# Altium PCB Relayboard.PcbDoc (part 1 of 2)
Units mm, origin at the board's own origin, x right, y up, seen from the top; angles counter-clockwise.
Board outline 76.6 x 71.56 mm, 2 copper layers (Top Layer, Bottom Layer); 43 components, 40 nets, 153 pads, 27 vias.
Unrouted connection lines stored in the file: 21.
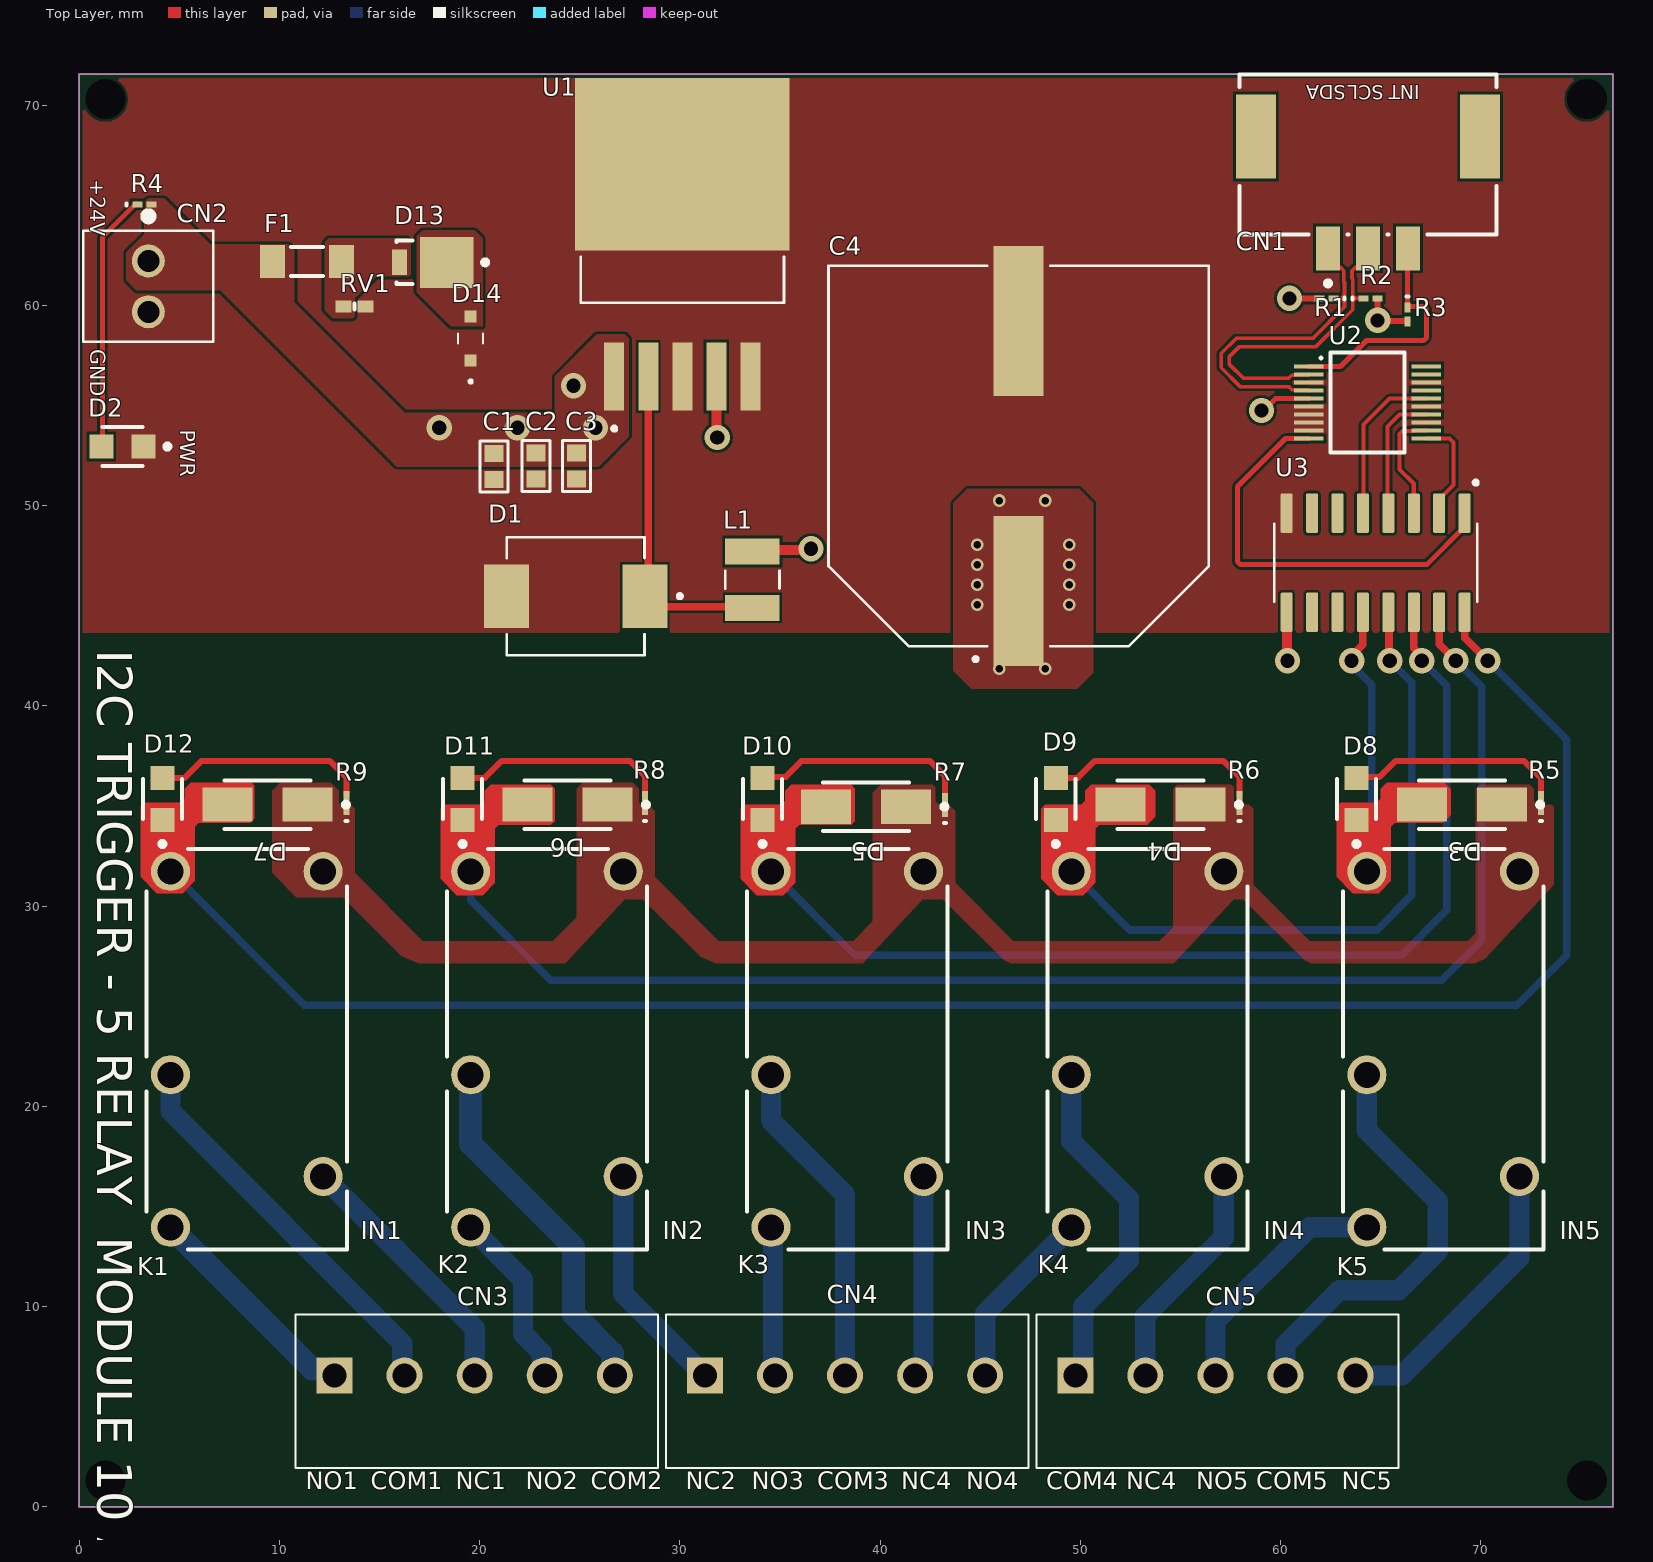
[diagram p0: Top Layer view]
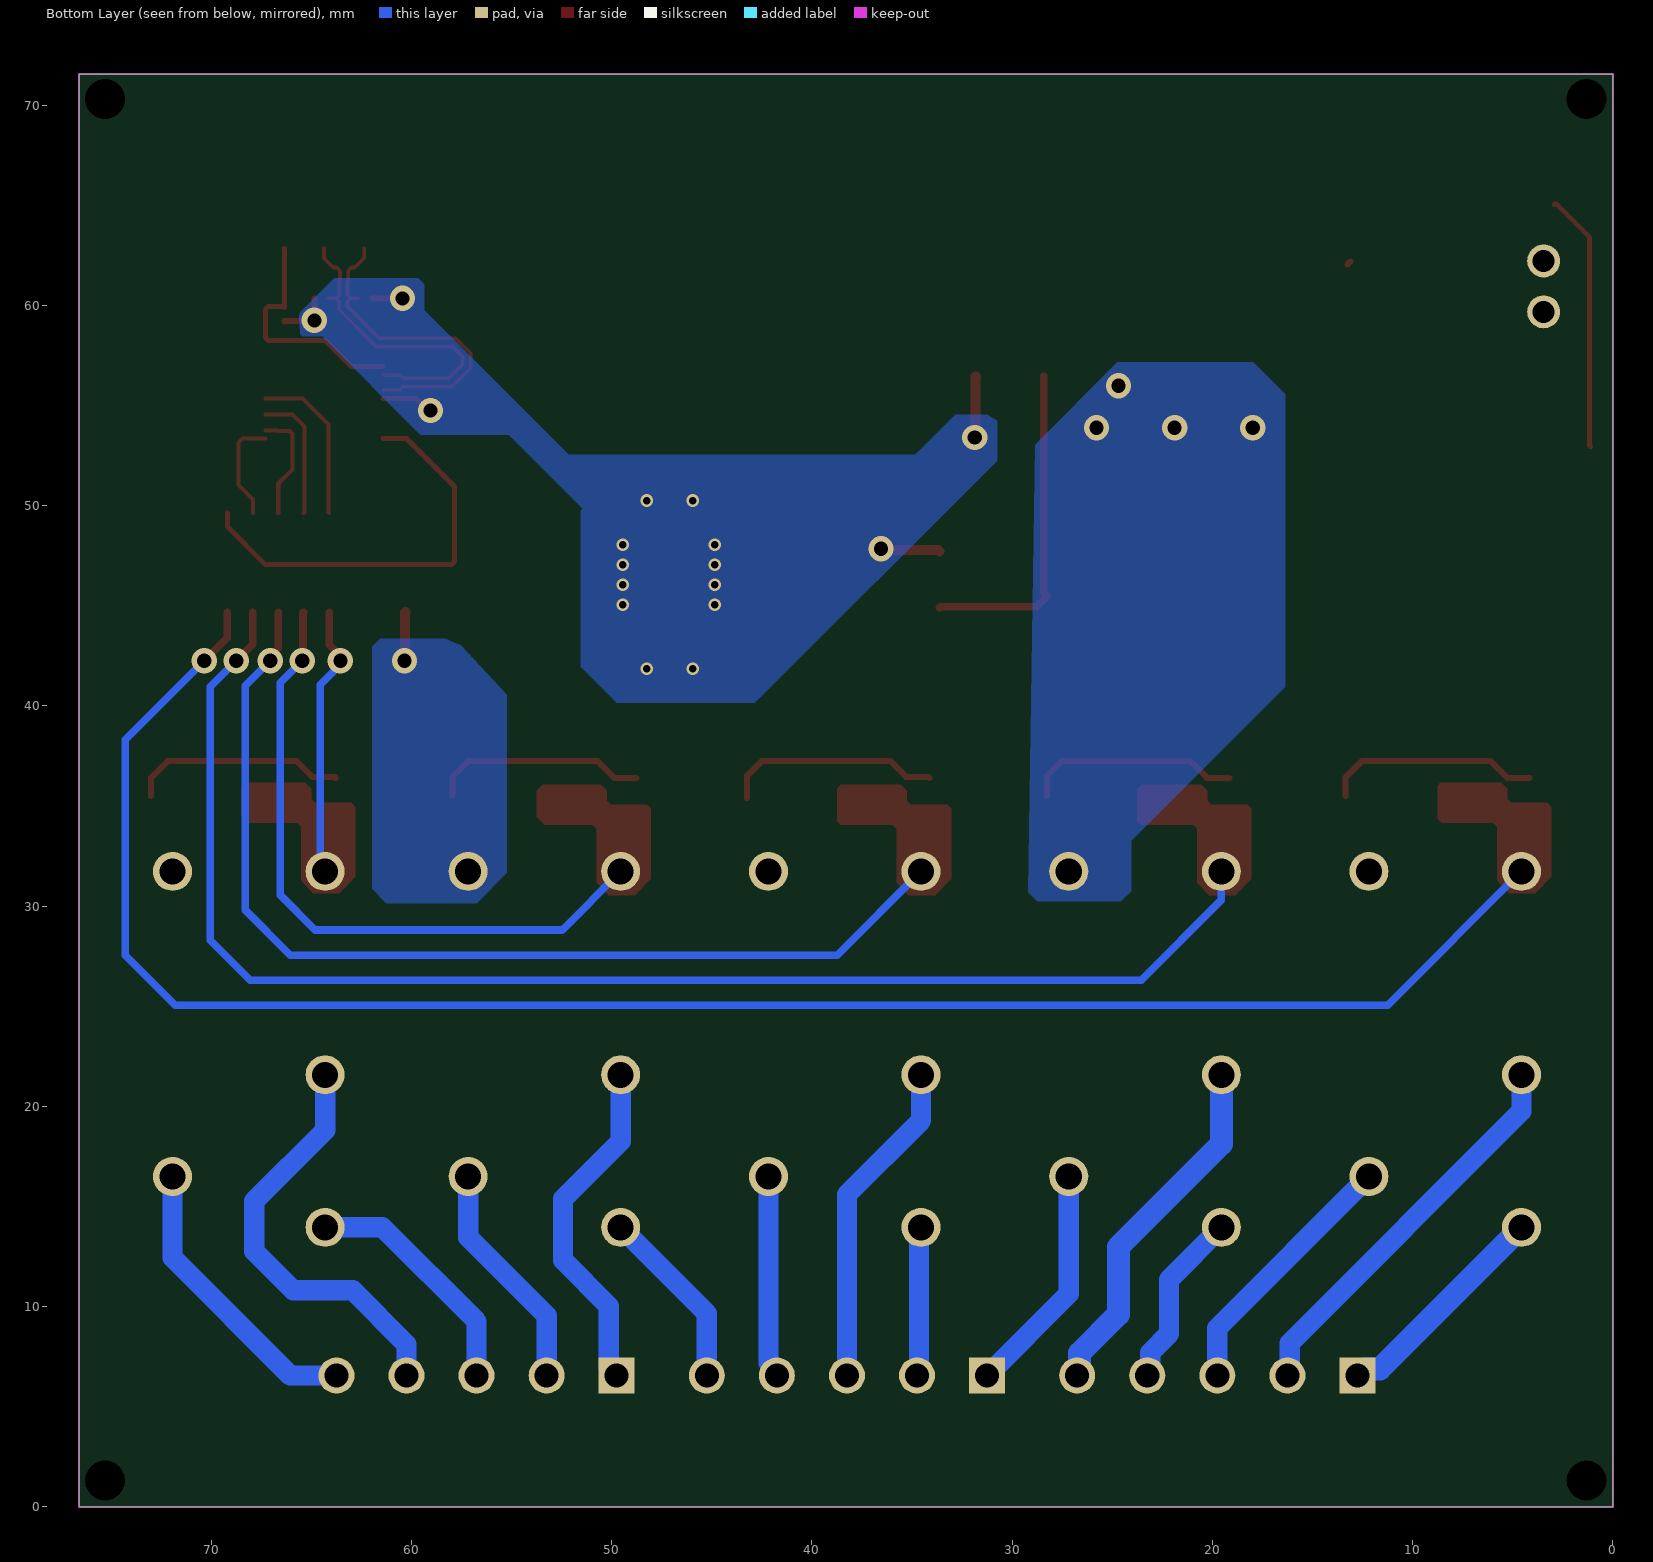
[diagram p1: Bottom Layer view, seen from below]
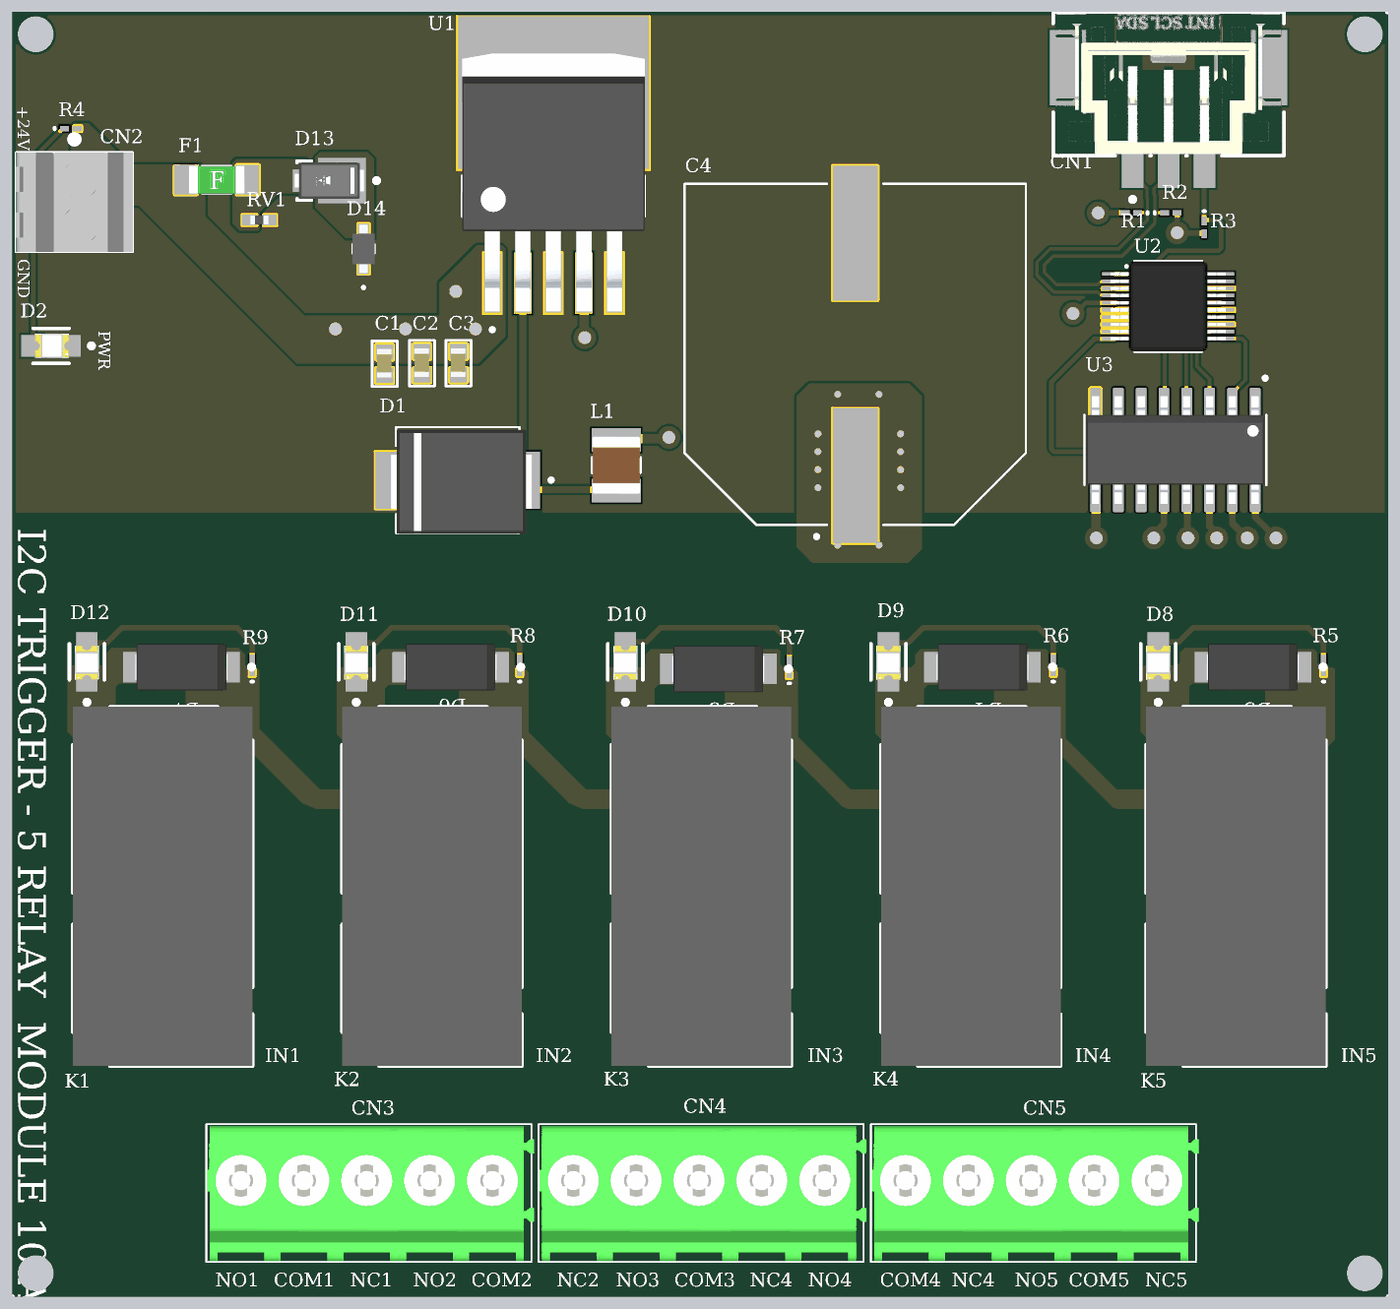
[diagram p2: 3D render of the assembled board from above, using the file's embedded part models]

## Layer stack, top to bottom
Top Solder: solder mask 0.0102, Solder Resist, Dk 3.5
Top Layer: signal copper 0.0356
Dielectric 1: dielectric 0.32, FR-4, Dk 4.8
Bottom Layer: signal copper 0.0356
Bottom Solder: solder mask 0.0102, Solder Resist, Dk 3.5

## Board outline
0,0 0,71.556 76.603,71.556 76.603,0 5.871,0

## Design rules (kind name [scope] priority, off if disabled: settings)
Clearance [All] p1: gap=0.127 ignorepadtopadclearanceinfootprint=FALSE
Clearance Contact_Clearence [InNetClass('Contact')] p2: gap=1.397 ignorepadtopadclearanceinfootprint=FALSE
Clearance 24V_Clearance [InNetClass('24V')] p3: gap=0.152 ignorepadtopadclearanceinfootprint=FALSE
DiffPairsRouting I2C [All] p1: maxlimit=0.127 minlimit=0.127 mostfreqgap=0.127 toplayer_minwidth=0.279 toplayer_maxwidth=1.095 toplayer_prefwidth=0.279 bottomlayer_minwidth=0.279 bottomlayer_maxwidth=1.095 bottomlayer_prefwidth=0.279 impedanceprofiledriven=TRUE impedanceprofileid={0FCB3889-9E1A-408E-99D7-05F87C115106} impedanceprofilevalue=90.000000 maxuncoupledlength=12.7
DiffPairsRouting DiffPairsRouting_1 [All] p2: maxlimit=0.254 minlimit=0.254 mostfreqgap=0.254 toplayer_minwidth=0.381 toplayer_maxwidth=0.381 toplayer_prefwidth=0.381 bottomlayer_minwidth=0.381 bottomlayer_maxwidth=0.381 bottomlayer_prefwidth=0.381 maxuncoupledlength=12.7
PolygonConnect [All] p1: connectstyle=Direct reliefconductorwidth=0.254 reliefentries=4 polygonreliefangle="90 Angle" airgapwidth=0.254
RoutingVias [All] p1: holewidth=0.711 width=1.27 viastyle="Through Hole" minholewidth=0.711 minwidth=1.27 maxholewidth=0.711 maxwidth=1.27
SilkToSolderMaskClearance [IsText] p1: minsilkscreentomaskgap=0.254 clearancetoexposedcopper=TRUE
SolderMaskExpansion [All] p1: expansion=0.102 istentingtop=FALSE
Width Contact_Width [InNetClass('Contact')] p1: maxlimit=1.27 minlimit=1.016 preferedwidth=1.143
Width 24V_Width [All] p2: maxlimit=0.508 minlimit=0.254 preferedwidth=0.381
Width [All] p3: maxlimit=0.305 minlimit=0.203 preferedwidth=0.254
28 further rules are at their usual default settings.

## Classes and differential pairs
net class 24V: OUT4
net class Contact: NetCN3_1 NetCN3_2 NetCN3_3 NetCN3_4 NetCN3_5 NetCN4_1 NetCN4_2 NetCN4_3 NetCN4_4 NetCN4_5 NetCN5_1 NetCN5_2 NetCN5_3 NetCN5_4 NetCN5_5
component class RELAYBOARD: C1 C2 C3 C4 D1 D2 D3 D4 D5 D6 D7 D8 D9 D10 D11 D12 D13 D14 F1 K1 K2 K3 K4 K5 L1 R1 R2 R3 R4 R5 R6 R7 R8 R9 RV1 U1 U2 U3
component class connectors: CN1 CN2 CN3 CN4 CN5
differential pair I2C_DIF: +I2C_SCL -I2C_SDA

## Components (designator, comment, footprint, x,y, rotation, side; value= is the part's Value field where it differs from the comment)
C1 "1uF" CAP-0603 20.73,51.956 r90 top
C2 "10nF" CAP-0603 22.812,51.987 r90 top
C3 "100nF" CAP-0603 24.844,51.987 r90 top
C4 "1000uF" "CAP RADIAL 1000UF" 47.055,52.356 r90 top
CN1 "5600200320" 5600200320 64.374,67.538 r180 top
CN2 "282834-2" 282834-2 3.455,60.956 r270 top
CN3 "1984646" 1984646 19.755,6.556 r0 top locked
CN4 "1984646" 1984646 38.255,6.556 r0 top locked
CN5 "1984646" 1984646 56.755,6.556 r0 top locked
D1 "SS34" SS34 24.8,45.479 r180 top
D2 "LS R976-NR-1" "LS R976-NR-1" 2.155,52.956 r180 top
D3 "S1A-13-F" S1A-13-F 69.069,35.065 r180 top locked
D4 "S1A-13-F" S1A-13-F 54.013,35.065 r180 top locked
D5 "S1A-13-F" S1A-13-F 39.305,34.965 r180 top locked
D6 "S1A-13-F" S1A-13-F 24.397,35.065 r180 top locked
D7 "S1A-13-F" S1A-13-F 9.414,35.065 r180 top locked
D8 "LS R976-NR-1" "LS R976-NR-1" 63.797,35.356 r90 top locked
D9 "LS R976-NR-1" "LS R976-NR-1" 48.779,35.356 r90 top locked
D10 "LS R976-NR-1" "LS R976-NR-1" 34.133,35.356 r90 top locked
D11 "LS R976-NR-1" "LS R976-NR-1" 19.152,35.356 r90 top locked
D12 "LS R976-NR-1" "LS R976-NR-1" 4.155,35.356 r90 top locked
D13 "SS3P5-M3/84A" SS3P5-M3/84A 17.655,62.156 r180 top
D14 "PESD1IVN27-AX" PESD1IVN27-AX 19.555,58.356 r90 top
F1 "SF-1206S150-2" "FUSE 1206_3216 0.6MM" 11.38,62.206 r0 top
K1 "ALQ1F24" ALQ1F24-5 8.374,22.846 r270 top locked
K2 "ALQ1F24" ALQ1F24-5 23.365,22.846 r270 top locked
K3 "ALQ1F24" ALQ1F24-5 38.365,22.846 r270 top locked
K4 "ALQ1F24" ALQ1F24-5 53.365,22.846 r270 top locked
K5 "ALQ1F24" ALQ1F24-5 68.129,22.846 r270 top locked
L1 "100uH" CBC3225T101MR 33.63,46.306 r90 top
R1 "10K" 0603 62.305,60.356 r180 top
R2 "10K" 0603 64.505,60.356 r0 top
R3 "10K" 0603 66.355,59.556 r270 top
R4 "1.2K" 0603 3.255,65.056 r0 top
R5 "1.2K" 0603 73.006,35.156 r90 top locked
R6 "1.2K" 0603 57.955,35.156 r90 top locked
R7 "1.2K" 0603 43.255,35.056 r90 top locked
R8 "1.2K" 0603 28.255,35.156 r90 top locked
R9 "1.2K" 0603 13.355,35.156 r90 top locked
RV1 "EZA-EG2N50AX" EZA-EG2N50AX 13.755,59.956 r180 top
U1 "LM2576SX-5.0/NOPB" LM2576SX-5.0/NOPB 30.125,61.754 r90 top
U2 "PCF8574DGVR" TVSOP-20 64.355,55.156 r0 top
U3 "SN75469DR" SN75469DR-SOIC16 64.755,47.156 r270 top

## Footprints (in the part's own frame and the unit in brackets; to place one, negate y for a bottom-side part, rotate by r counter-clockwise, add the part's x,y. Pads: shape width x height; smd on the part's side, far side on the other; paste and mask are expansions set on the pad)
0603 [mm] "Chip Inductor, Body 0.6x0.3mm, IPC High Density"
  rect 0.5x0.3 smd: 1(-0.35,0) 2(0.35,0)
  silkscreen extent -0.9,-0.05 -0.9,0.05, body extent -0.33,-0.18 0.33,0.18, height 0.55
282834-2 [mm]
  round 1.65 hole 1.1: 1(-1.27,0) 2(1.27,0)
  silkscreen extent -3.7,-3.25 2.77,3.25, body extent -2.77,-3.25 2.77,3.25, height 9.5
1984646 [mm]
  rect 1.8x1.8 hole 1.2: 1(-7,0)
  round 1.8 hole 1.2: 2(-3.5,0) 3(0,0) 4(3.5,0) 5(7,0)
  silkscreen extent -8.95,-4.62 9.15,3.05, body extent -8.9,-4.59 9.3,2.96, height 9.15
5600200320 [mm]
  rect 1.2x2.2 smd paste+0 mask+0: 1(2,4.68) 2(0,4.68) 3(-2,4.68)
  rect 2x4.2 smd paste+0 mask+0: 4(-5.6,-0.9) 5(5.6,-0.9)
  silkscreen extent -6.43,-4 6.43,6.55, body extent -6.3,-3.9 6.3,5.25, height 8.2
ALQ1F24-5 [mm]
  round 1.95 hole 1.3: C1(-8.89,3.81) C2(-8.89,-3.81) COM(1.27,-3.81) NC(6.35,3.81) NO(8.89,-3.81)
  silkscreen extent -10,-5 10,5, body extent -10,-5 10,5, height 16.5
"CAP RADIAL 1000UF" [mm]
  rect 7.5x2.5 smd: 1(-6.623,0.127) 2(6.877,0.127)
  silkscreen extent -10.12,-9.37 9.63,9.63, body extent -10.2,-9.5 10.2,9.5, height 16.51
CAP-0603 [mm]
  rect 0.85x0.95 smd: 1(-0.65,0) 2(0.65,0)
  silkscreen extent -1.27,-0.7 1.27,0.7, body extent -0.78,-0.39 0.82,0.44, height 0.82
CBC3225T101MR [mm]
  rect 1.3x2.72 smd: 1(-1.41,0) 2(1.41,0)
  silkscreen extent -0.44,-1.35 0.44,1.35, body extent -1.6,-1.35 1.6,1.35, height 2.55
EZA-EG2N50AX [mm]
  rect 0.8x0.6 smd: 1(-0.55,0) 2(0.55,0)
  silkscreen extent 0,-0.15 0,0.15, body extent -0.5,-0.25 0.5,0.25, height 0.43
"FUSE 1206_3216 0.6MM" [mm] "Chip Fuse 1.5A AC 63V DC, 2-Leads, Body 3.10x1.55mm, IPC Medium Densitym"
  rect 1.25x1.65 smd: 1(-1.725,0) 2(1.725,0)
  silkscreen extent -0.8,-0.72 0.8,0.72, body extent -1.55,-0.77 1.55,0.78, height 0.76
LM2576SX-5.0/NOPB [mm]
  rect 3.4x1 smd paste-3 mask+0: 1(-5.3,3.4) 2(-5.3,1.7) 3(-5.3,0) 4(-5.3,-1.7) 5(-5.3,-3.4)
  rect 8.6x10.7 smd paste-6 mask+0: 6(5.3,0)
  silkscreen extent -8,-5.08 0.68,5.08, body extent -6.88,-5.08 7.48,5.08, height 4.66
"LS R976-NR-1" [mm]
  rect 1.2x1.2 smd paste+0 mask+0: 1(-1.05,0) 2(1.05,0)
  silkscreen extent -2.38,-0.97 1,0.97, body extent -1,-0.68 0.9,0.68, height 0.9
PESD1IVN27-AX [mm]
  rect 0.6x0.6 smd: 1(-1.1,0) 2(1.1,0)
  silkscreen extent -2.2,-0.63 0.25,0.63, body extent -1.34,-0.63 1.34,0.63, height 1.2
S1A-13-F [mm]
  rect 2.5x1.7 smd paste+0 mask+0: 1(-2,0) 2(2,0)
  silkscreen extent -4.03,-1.2 2.15,1.2, body extent -2.6,-1.3 2.6,1.3, height 2.4
SN75469DR-SOIC16 [mm]
  rrect25% 1.97x0.6 smd: 1(-2.475,4.445) 2(-2.475,3.175) 3(-2.475,1.905) 4(-2.475,0.635) 5(-2.475,-0.635) 6(-2.475,-1.905) 7(-2.475,-3.175) 8(-2.475,-4.445) 9(2.475,-4.445) 10(2.475,-3.175) 11(2.475,-1.905) 12(2.475,-0.635) 13(2.475,0.635) 14(2.475,1.905) 15(2.475,3.175) 16(2.475,4.445)
  silkscreen extent -4.1,-5.06 1.95,5.1, body extent -3,-4.95 3,4.95, height 1.75
SS3P5-M3/84A [mil]
  rect 105.12x100 smd paste+0 mask+0: 1(-27.5,0)
  rect 30x50 smd paste+0 mask+0: 2(65.06,0)
  silkscreen extent -108,-43 71,43, body extent -76,-40 76,40, height 39
SS34 [mm]
  rect 2.25x3.18 smd: A(3.455,0) C(-3.455,0)
  silkscreen extent -5.3,-2.95 3.44,2.95, body extent -4.15,-2.8 3.75,3, height 2.46
TVSOP-20 [mm]
  rect 1.475x0.2 smd: 1(-2.938,1.8) 2(-2.938,1.4) 3(-2.938,1) 4(-2.938,0.6) 5(-2.938,0.2) 6(-2.938,-0.2) 7(-2.938,-0.6) 8(-2.938,-1) 9(-2.938,-1.4) 10(-2.938,-1.8) 11(2.938,-1.8) 12(2.938,-1.4) 13(2.938,-1) 14(2.938,-0.6) 15(2.938,-0.2) 16(2.938,0.2) 17(2.938,0.6) 18(2.938,1) 19(2.938,1.4) 20(2.938,1.8)
  silkscreen extent -2.32,-2.5 1.85,2.5, body extent -3.2,-2.5 3.2,2.5, height 1.13

## Part data
C1: library part UMK107ABJ105MAHT, "Cap Ceramic 1uF 50V X5R 20% Pad SMD 0603 85C Low ESR Automotive T/R", Case Code (Metric)=1608, Case Code (Imperial)=0603, Manufacturer="Taiyo Yuden", Max Operating Temperature=85°C, Min Operating Temperature=-55°C, Ratings=AEC-Q200, Supplier Part Number 1=587-4958-1-ND, Tolerance=20%, Voltage Rating=50V, Capacitance=1uF, Case/Package=0603, Category="Ceramic Capacitors", ComponentLink1Description=https://www.yuden.co.jp/productdata/catalog/mlcc_all_hq_e.pdf?src-supplier=Digi-Key, ComponentLink1URL=https://www.yuden.co.jp/productdata/catalog/mlcc_all_hq_e.pdf?src-supplier=Digi-Key, Manufacturer Part Number=UMK107ABJ105MAHT, Mount="Surface Mount", Packaging="Tape and Reel", Pricing 1="1=0,27000, 10=0,18400, 50=0,11020, 100=0,09310, 500=0,06368, 1000=0,05634 (USD)", RoHS=Yes, RoHS Compliant=Yes, Stock 1=1950, Supplier 1=Digi-Key
C2: library part C0603C103M5RAC7411, "Cap Ceramic 0.01uF 50V X7R 20% SMD 0603 125°C Paper T/R", Case Code (Metric)=1608, Case Code (Imperial)=0603, Dielectric=X7R, Dielectric Material=Ceramic, Manufacturer=KEMET, Max Operating Temperature=125°C, Min Operating Temperature=-55°C, Package Quantity=50000, Supplier Part Number 1=399-C0603C103M5RAC7411CT-ND, Tolerance=20%, Voltage Rating=50V, Capacitance=10nF, Case/Package=0603, Category="Ceramic Capacitors", ComponentLink1Description=http://www.mouser.com/ds/2/212/KEM_C1002_X7R_SMD-1102033.pdf?src-supplier=Mouser, ComponentLink1URL=http://www.mouser.com/ds/2/212/KEM_C1002_X7R_SMD-1102033.pdf?src-supplier=Mouser, ComponentLink2Description=http://capacitoredge.kemet.com/capedge2/DataSheet?pn=C0603C103M5RAC7411&src-supplier=Avnet, ComponentLink2URL=http://capacitoredge.kemet.com/capedge2/DataSheet?pn=C0603C103M5RAC7411&src-supplier=Avnet, Construction=Flat, Contact Plating=Tin,Matte, Depth=0.8mm, Height=0.8mm, Lead Pitch=0.7mm, Length=1.6mm, Manufacturer Part Number=C0603C103M5RAC7411, Mount="Surface Mount", Packaging="Tape and Reel", Pricing 1="1=0,10000, 10=0,03000, 50=0,01640, 100=0,01350, 500=0,00962, 1000=0,00756, 2500=0,00688, 5000=0,00632 (USD)", Radiation Hardening=No, RoHS=Yes, RoHS Compliant=Yes, Series=C0603C, Stock 1=336197, Supplier 1=Digi-Key, Termination=SMD/SMT, Voltage Rating (DC)=50V
C3: library part C0603C104K5RAC7411, "Cap Ceramic 0.1uF 50V X7R 10% SMD 0603 125°C Paper T/R 100nF", Case Code (Metric)=1608, Case Code (Imperial)=0603, Dielectric=X7R, Dielectric Material=Ceramic, Manufacturer=KEMET, Max Operating Temperature=125°C, Min Operating Temperature=-55°C, Package Quantity=15000, Supplier Part Number 1=399-7374-2-ND, Tolerance=10%, Voltage Rating=50V, Capacitance=100nF, Case/Package=0603, Category="Ceramic Capacitors", ComponentLink1Description=https://datasheet.ciiva.com/5424/kem-c1002-x7r-smd-5424426.pdf?src-supplier=Mouser, ComponentLink1URL=https://datasheet.ciiva.com/5424/kem-c1002-x7r-smd-5424426.pdf?src-supplier=Mouser, Depth=0.8mm, Dissipation Factor=2.5%, Height=0.8mm, Lead Pitch=0.7mm, Length=1.6mm, Manufacturer Part Number=C0603C104K5RAC7411, Mount="Surface Mount", Packaging="Tape and Reel", Pricing 1="15000=0,01540, 30000=0,01463, 75000=0,01309, 105000=0,01059, 150000=0,01024, 375000=0,00963 (USD)", Radiation Hardening=No, RoHS=Yes, Stock 1=3300000, Supplier 1=Digi-Key, Termination=SMD/SMT, Thickness=0.035inch, Voltage Rating (DC)=50V, Width=0.031inch
C4: library part EEETK1E102AM, "Cap Aluminum Lytic 1000uF 25V 20% (18 X 16.5mm) SMD 0.075 Ohm 1300mA 2000h 125C Automotive T/R", Capacitance=1mF, Case/Package=Radial, ESR (Equivalent Series Resistance)=75mR, Leakage Current=300uA, Manufacturer=Panasonic, Manufacturer Part Number=EEE-TK1E102AM, Max Operating Temperature=125°C, Min Operating Temperature=-40°C, Package Quantity=125, Ripple Current=1.3A, Supplier Part Number 1=PCE4890CT-ND, Tolerance=20%, Voltage=25V, Category="Aluminum Electrolytic Capacitors", ComponentLink1Description=https://datasheet.ciiva.com/11777/0900766b8102e63d-11777138.pdf?src-supplier=RSComponents, ComponentLink1URL=https://datasheet.ciiva.com/11777/0900766b8102e63d-11777138.pdf?src-supplier=RSComponents, ComponentLink2Description=https://datasheet.ciiva.com/24071/aba0000ce121-470559-24071175.pdf?src-supplier=Mouser, ComponentLink2URL=https://datasheet.ciiva.com/24071/aba0000ce121-470559-24071175.pdf?src-supplier=Mouser, Construction=Cylindrical, Diameter=18mm, Dissipation Factor=0.18%, Height=16.5mm, Height - Seated (Max)=0.65inch, Lead Diameter=1.2mm, Lead Free="Lead Free", Lead Pitch=6.7mm, Length=16.5mm, Life (Hours)=2000Hour, Mount="Surface Mount", Number of Pins=16, Packaging="Tape and Reel", Polarity=Polar, Pricing 1="1=3,55000, 10=2,86900, 50=2,50360 (USD)", REACH SVHC="No SVHC", Ripple Current (AC)=1.3A, RoHS=Yes, RoHS Compliant=Yes, Series=TK, Stock 1=337, Supplier 1=Digi-Key, Termination=SMD/SMT, Voltage Rating=25V, Voltage Rating (DC)=25V
CN1: "2.0mmDuraClik Wire-to-Board Header, Single Row, Vertical, 3 Circuits, Tin (Sn) Over Nickel, Natural", Manufacturer=Molex, Supplier Part Number 1=WM10863CT-ND, Category="Headers and Wire Housings", ComponentLink1Description=http://www.farnell.com/datasheets/2214714.pdf?src-supplier=Farnell, ComponentLink1URL=http://www.farnell.com/datasheets/2214714.pdf?src-supplier=Farnell, ComponentLink2Description=http://www.literature.molex.com/SQLImages/kelmscott/Molex/PDF_Images/987650-8742.PDF?src-supplier=Digi-Key, ComponentLink2URL=http://www.literature.molex.com/SQLImages/kelmscott/Molex/PDF_Images/987650-8742.PDF?src-supplier=Digi-Key, ComponentLink3Description=http://www.molex.com/pdm_docs/sd/5600200320_sd.pdf?src-supplier=Avnet, ComponentLink3URL=http://www.molex.com/pdm_docs/sd/5600200320_sd.pdf?src-supplier=Avnet, ComponentLink4Description=http://www.farnell.com/datasheets/2214714.pdf?src-supplier=Newark, ComponentLink4URL=http://www.farnell.com/datasheets/2214714.pdf?src-supplier=Newark, Manufacturer Part Number=5600200320, Pricing 1="1=0,92000, 10=0,75900, 100=0,63250 (USD)", RoHS=Yes, Stock 1=33175, Supplier 1=Digi-Key
CN2: "Conn Terminal Block 2 POS 2.54mm Solder ST Thru-Hole 10A/Contact", Manufacturer="TE Connectivity", Supplier Part Number 1=A98333-ND, Category="Terminal Blocks", ComponentLink1Description=https://datasheet.ciiva.com/11758/0900766b80e7dc96-11758675.pdf?src-supplier=RSComponents, ComponentLink1URL=https://datasheet.ciiva.com/11758/0900766b80e7dc96-11758675.pdf?src-supplier=RSComponents, ComponentLink2Description=https://datasheet.ciiva.com/16386/282834-2-16386363.pdf?src-supplier=Future+Electronics, ComponentLink2URL=https://datasheet.ciiva.com/16386/282834-2-16386363.pdf?src-supplier=Future+Electronics, ComponentLink3Description=https://datasheet.ciiva.com/16676/eng-cs-1308389-eurostyle-terminal-blocks-0607-16676126.pdf?src-supplier=Avnet+Europe, ComponentLink3URL=https://datasheet.ciiva.com/16676/eng-cs-1308389-eurostyle-terminal-blocks-0607-16676126.pdf?src-supplier=Avnet+Europe, ComponentLink4Description=https://datasheet.ciiva.com/823/eng-cd-282834-c1-823453.pdf?src-supplier=Digi-Key, ComponentLink4URL=https://datasheet.ciiva.com/823/eng-cd-282834-c1-823453.pdf?src-supplier=Digi-Key, ComponentLink5Description=https://datasheet.ciiva.com/15169/getdatasheetpartid-155864-15169558.pdf?src-supplier=Verical, ComponentLink5URL=https://datasheet.ciiva.com/15169/getdatasheetpartid-155864-15169558.pdf?src-supplier=Verical, ComponentLink6Description=https://datasheet.ciiva.com/3141/eng-cs-1308389-eurostyle-terminal-blocks-0607-3141115.pdf?src-supplier=Avnet, ComponentLink6URL=https://datasheet.ciiva.com/3141/eng-cs-1308389-eurostyle-terminal-blocks-0607-3141115.pdf?src-supplier=Avnet, ComponentLink7Description=https://datasheet.ciiva.com/30166/eng-cs-1308389-eurostyle-terminal-blocks-0607-30166974.pdf?src-supplier=Onlinecomponents.com, ComponentLink7URL=https://datasheet.ciiva.com/30166/eng-cs-1308389-eurostyle-terminal-blocks-0607-30166974.pdf?src-supplier=Onlinecomponents.com, ComponentLink8Description=https://datasheet.ciiva.com/14609/70086732-14609670.pdf?src-supplier=Allied+Electronics, ComponentLink8URL=https://datasheet.ciiva.com/14609/70086732-14609670.pdf?src-supplier=Allied+Electronics, Manufacturer Part Number=282834-2, Pricing 1="1=1,45000, 10=1,01900, 25=0,95080, 50=0,86300, 100=0,85910, 250=0,72548, 500=0,68728, 1000=0,61092, 5000=0,57274 (USD)", RoHS=Yes, Stock 1=28181, Supplier 1=Digi-Key
CN3 CN4 CN5: "Terminal Block, Printed Circuit, 10 A, 160 V, 3.5 mm, 5, 3.5 mm, 1.2 mm, M2, PA", Color=Green, Current=10A, Current Rating=17.5A, Flammability Rating="UL94 V-0", Manufacturer="Phoenix Contact", Package Quantity=100, Supplier Part Number 1=277-1723-ND, Voltage=300V, Voltage Rating=160V, Approvals=UL, Category="Terminal Blocks", ComponentLink1Description=https://datasheet.ciiva.com/16070/1984646-16070645.pdf?src-supplier=Onlinecomponents.com, ComponentLink1URL=https://datasheet.ciiva.com/16070/1984646-16070645.pdf?src-supplier=Onlinecomponents.com, ComponentLink2Description=https://datasheet.ciiva.com/14608/70055018-14608827.pdf?src-supplier=Allied+Electronics, ComponentLink2URL=https://datasheet.ciiva.com/14608/70055018-14608827.pdf?src-supplier=Allied+Electronics, ComponentLink3Description=https://datasheet.ciiva.com/824/combiconcompactseries-824269.pdf?src-supplier=Digi-Key, ComponentLink3URL=https://datasheet.ciiva.com/824/combiconcompactseries-824269.pdf?src-supplier=Digi-Key, ComponentLink4Description=https://datasheet.ciiva.com/29221/568532-da-01-en-leiterplatten-anschlusskl-1984646-100st-29221147.pdf?src-supplier=Conrad, ComponentLink4URL=https://datasheet.ciiva.com/29221/568532-da-01-en-leiterplatten-anschlusskl-1984646-100st-29221147.pdf?src-supplier=Conrad, Contact Material=Tin, Depth=9.2mm, Gender=Male, Height=9mm, Housing Color=Green, Housing Material=Nylon, Lead Free="Lead Free", Length=7.6mm, Manufacturer Part Number=1984646, Material=Polyamide, Max Current Rating=17.5A, Mount="Through Hole", Number of Circuits=5, Number of Contacts=5, Number of Levels=1, Number of Pins=5, Number of Poles=5, Number of Positions=5, Number of Positions Per Level=5, Number of Rows=1, Orientation=Straight, Packaging=Bulk, Pitch=3.5mm, Pricing 1="1=1,25000, 10=1,19900, 50=1,16640, 100=1,09000, 250=1,03768 (USD)", RoHS=Yes, Stock 1=1070, Stripping Length=5mm, Supplier 1=Digi-Key, Termination=Screw, Weight=0.080425oz, Width=17.5mm, Wire Gauge (Max)=26AWG, Wire Gauge (Min)=26AWG, Insulation Material=Nylon
D1: "SS Series 500 mV 3 A 40 V Max Reverse Voltage Schottky Rectifier - DO-214AB", Average Rectified Current=3A, Case/Package=SMC, Forward Voltage=500mV, Manufacturer="ON Semiconductor / Fairchild", Max Forward Surge Current (Ifsm)=100A, Max Operating Temperature=150°C, Max Power Dissipation=2.27W, Max Repetitive Reverse Voltage (Vrrm)=40V, Max Reverse Current=500uA, Min Operating Temperature=-55°C, Package Quantity=1, Supplier Part Number 1=SS34FSTR-ND, Category="Schottky Diodes", Contact Plating=Tin,Matte, Current=3A, Current Rating=3A, Element Configuration=Single, Forward Current=3A, Height=2.75mm, Lead Free="Lead Free", Length=7.15mm, Manufacturer Part Number=SS34, Max Reverse Leakage Current=500uA, Max Reverse Voltage (DC)=40V, Max Surge Current=100A, Mount="Surface Mount", Number of Elements=1, Number of Pins=2, Number of Terminals/Pins=2, Output Current=3A, Packaging="Tape and Reel", Peak Non-Repetitive Surge Current=100A, Polarity=Standard, Pricing 1="3000=0,28805 (USD)", Radiation Hardening=No, REACH SVHC="No SVHC", RoHS=Yes, RoHS Compliant=Yes, Stock 1=48500, Supplier 1=Digi-Key, Voltage=40V, Voltage Rating (DC)=40V, Width=6.25mm
D2 D8 D9 D10 D11 D12: "Led SMT Red 0805 Tape", Case Code (Metric)=2012, Case Code (Imperial)=0805, Color=Red, Forward Current=25mA, Forward Voltage=2.5V, Lens Color=White, Manufacturer="Osram Opto", Manufacturer Part Number=LSR976-NR-1, Max Operating Temperature=85°C, Min Operating Temperature=-30°C, Package Quantity=16000, Power Dissipation=65mW, Reverse Voltage=12V, Supplier Part Number 1=475-1278-1-ND, Test Current=20mA, Case/Package=0805, Category=LEDs, ComponentLink1Description=https://datasheet.ciiva.com/4688/o-ls-ly-r976-24152-4688435.pdf?src-supplier=Mouser, ComponentLink1URL=https://datasheet.ciiva.com/4688/o-ls-ly-r976-24152-4688435.pdf?src-supplier=Mouser, ComponentLink2Description=https://datasheet.ciiva.com/26920/getdatasheetpartid-568367-26920831.pdf?src-supplier=Verical, ComponentLink2URL=https://datasheet.ciiva.com/26920/getdatasheetpartid-568367-26920831.pdf?src-supplier=Verical, ComponentLink3Description=https://datasheet.ciiva.com/2112/00078896-0-2112782.pdf?src-supplier=Digi-Key, ComponentLink3URL=https://datasheet.ciiva.com/2112/00078896-0-2112782.pdf?src-supplier=Digi-Key, ComponentLink4Description=https://datasheet.ciiva.com/2112/00078896-0-2112781.pdf?src-supplier=Digi-Key, ComponentLink4URL=https://datasheet.ciiva.com/2112/00078896-0-2112781.pdf?src-supplier=Digi-Key, ComponentLink5Description=https://datasheet.ciiva.com/2112/00078896-0-2112783.pdf?src-supplier=Digi-Key, ComponentLink5URL=https://datasheet.ciiva.com/2112/00078896-0-2112783.pdf?src-supplier=Digi-Key, Depth=1.35mm, Dominant Wavelength=633nm, Height=0.9mm, Length=2.1mm, Lens Size=1.25mm, Lens Style=Flat,Diffused,Colorless,Rectangular, Lens Transparency=Diffused, Luminous Flux=0.47lm, Luminous Intensity=180mcd, Mount="Surface Mount", Number of Elements=1, Number of LEDs=1, Number of Pins=2, Packaging="Tape and Reel", Pricing 1="1=0,31000, 10=0,16700, 100=0,07750, 500=0,07152, 1000=0,05602, 2000=0,05483 (USD)", Radiation Hardening=No, RoHS=Yes, RoHS Compliant=Yes, Series="CHIPLED 0805", Stock 1=165904, Supplier 1=Digi-Key, Viewing Angle=160°, Width=1.25mm, Illumination Color=Red
D3 D4 D5 D6 D7: "VR=50V IF=1A 10pF Trr=3us", Average Rectified Current=1A, Capacitance=10pF, Case/Package=SMA, Forward Voltage=1.1V, Manufacturer=Diodes, Max Forward Surge Current (Ifsm)=30A, Max Operating Temperature=150°C, Max Repetitive Reverse Voltage (Vrrm)=50V, Max Reverse Current=5uA, Min Operating Temperature=-65°C, Package Quantity=5000, Supplier Part Number 1=S1A-FDICT-ND, Category="Rectifier Diodes", ComponentLink1Description=https://datasheet.ciiva.com/911/ds16003-911872.pdf?src-supplier=Digi-Key, ComponentLink1URL=https://datasheet.ciiva.com/911/ds16003-911872.pdf?src-supplier=Digi-Key, ComponentLink2Description=https://datasheet.ciiva.com/27052/1541520-27052419.pdf?src-supplier=Jameco, ComponentLink2URL=https://datasheet.ciiva.com/27052/1541520-27052419.pdf?src-supplier=Jameco, ComponentLink3Description=https://datasheet.ciiva.com/8301/ds16003-8301429.pdf?src-supplier=Avnet, ComponentLink3URL=https://datasheet.ciiva.com/8301/ds16003-8301429.pdf?src-supplier=Avnet, ComponentLink4Description=https://datasheet.ciiva.com/22695/1911706-22695830.pdf?src-supplier=Element14, ComponentLink4URL=https://datasheet.ciiva.com/22695/1911706-22695830.pdf?src-supplier=Element14, ComponentLink5Description=https://datasheet.ciiva.com/4453/ds16003-83672-4453580.pdf?src-supplier=Mouser, ComponentLink5URL=https://datasheet.ciiva.com/4453/ds16003-83672-4453580.pdf?src-supplier=Mouser, ComponentLink6Description=https://datasheet.ciiva.com/16199/ds16003-16199336.pdf?src-supplier=Future+Electronics, ComponentLink6URL=https://datasheet.ciiva.com/16199/ds16003-16199336.pdf?src-supplier=Future+Electronics, ComponentLink7Description=https://datasheet.ciiva.com/25953/ds16003-25953033.pdf?src-supplier=Avnet+Europe, ComponentLink7URL=https://datasheet.ciiva.com/25953/ds16003-25953033.pdf?src-supplier=Avnet+Europe, Current Rating=1A, Element Configuration=Single, Forward Current=1A, Height=2.1mm, Lead Free="Lead Free", Length=4.6mm, Manufacturer Part Number=S1A-13-F, Max Reverse Voltage (DC)=50V, Max Surge Current=30A, Mount="Surface Mount", Number of Pins=2, Output Current=1A, Packaging="Tape and Reel", Peak Non-Repetitive Surge Current=30A, Polarity=Standard, Pricing 1="1=0,27000, 10=0,22300, 100=0,11850, 500=0,07796, 1000=0,05301, 2000=0,04782 (USD)", Radiation Hardening=No, REACH SVHC="No SVHC", Recovery Time=1.8us, Reverse Recovery Time=3us, Reverse Voltage (DC)=50V, RoHS=Yes, RoHS Compliant=Yes, Series=-, Stock 1=971381, Supplier 1=Digi-Key, Termination=SMD/SMT, Voltage Rating (DC)=50V, Weight=0.002258oz, Width=2.92mm
D13: "VISHAY   SS3P5-M3/84A   DIODE, RECTIFIER, SCHOTTKY, 3A, 50V, SMP", Average Rectified Current=3A, Case/Package=DO-220AA, Forward Voltage=780mV, Manufacturer=Vishay, Max Forward Surge Current (Ifsm)=45A, Max Operating Temperature=150°C, Max Repetitive Reverse Voltage (Vrrm)=50V, Max Reverse Current=100uA, Min Operating Temperature=-55°C, Package Quantity=3000, Supplier Part Number 1=SS3P5-M3/84AGIDKR-ND, Category="Rectifier Diodes", ComponentLink1Description=https://datasheet.ciiva.com/25932/ss3p5-25932345.pdf?src-supplier=Avnet+Europe, ComponentLink1URL=https://datasheet.ciiva.com/25932/ss3p5-25932345.pdf?src-supplier=Avnet+Europe, ComponentLink2Description=https://datasheet.ciiva.com/29591/ss3p5-29591977.pdf?src-supplier=Digi-Key, ComponentLink2URL=https://datasheet.ciiva.com/29591/ss3p5-29591977.pdf?src-supplier=Digi-Key, ComponentLink3Description=https://datasheet.ciiva.com/8289/ss3p5-8289162.pdf?src-supplier=Avnet, ComponentLink3URL=https://datasheet.ciiva.com/8289/ss3p5-8289162.pdf?src-supplier=Avnet, ComponentLink4Description=https://datasheet.ciiva.com/7962/ss3p5-7962430.pdf?src-supplier=Element14, ComponentLink4URL=https://datasheet.ciiva.com/7962/ss3p5-7962430.pdf?src-supplier=Element14, Element Configuration=Single, Forward Current=3A, Height=1.15mm, Length=3.61mm, Manufacturer Part Number=SS3P5-M3/84A, Max Reverse Voltage (DC)=50V, Mount="Surface Mount", Number of Pins=2, Packaging="Tape and Reel", Peak Non-Repetitive Surge Current=45A, Pricing 1="1=0,45000, 10=0,34200, 100=0,21320, 500=0,14586, 1000=0,11220 (USD)", Radiation Hardening=No, REACH SVHC=Unknown, RoHS=Yes, RoHS Compliant=Yes, Series=eSMP®, Stock 1=773, Supplier 1=Digi-Key, Weight=0.000847oz, Width=2.18mm
D14: "PESD1IVN27-A/SOD323/SOD2", Manufacturer=Nexperia, Supplier Part Number 1=1727-7621-1-ND, Category="TVS Diodes", Manufacturer Part Number=PESD1IVN27-AX, Pricing 1="1=0,38000, 10=0,28000, 100=0,15850, 500=0,10494, 1000=0,08045 (USD)", RoHS=Yes, RoHS Compliant=Yes, Stock 1=374, Supplier 1=Digi-Key
F1: "FUSE BOARD MOUNT 1.5A 63VDC 1206", Breaking Capacity @ Rated Voltage=50A, Current Rating (Amps)=1.5A, Device Package="1206 (3216 Metric)", Manufacturer="Bourns Inc.", Operating Temperature="-20°C ~ 105°C", Supplier Part Number 1=SF-1206S150-2CT-ND, Voltage Rating - DC=63V, Approval Agency=UL, Approvals=UL, ComponentLink1Description=Datasheet, ComponentLink1URL=https://www.bourns.com/docs/Product-Datasheets/sf1206s.pdf, ComponentLink2Description="DigiKey Link", ComponentLink2URL=http://digikey.com/product-detail/en/bourns-inc/SF-1206S150-2/SF-1206S150-2CT-ND/1948213, Fuse Type="Board Mount (Cartridge Style Excluded)", LastUpdated="2.09.2020 01:30:42", Lifecycle Status=Active, Melting I²t=0.236, Minimum Order=1, Mounting Type="Surface Mount", Package / Case="1206 (3216 Metric)", Packaging=TapeAndReel, Part Number=SF-1206S150-2, Part Status=Active, Price=0.33, Response Time="Slow Blow", Series="SinglFuse™ SF-1206S", Size / Dimension="0.122\" L x 0.061\" W x 0.024\" H (3.10mm x 1.55mm x 0.60mm)", Supplier 1=DigiKey
K1 K2 K3 K4 K5: Manufacturer=Panasonic, Supplier Part Number 1=255-ALQ1F24-ND, Manufacturer Part Number=ALQ1F24, Pricing 1="1=3,01000, 10=2,82200, 25=2,50880, 50=2,38340, 100=2,25790, 250=2,00704, 500=1,88160, 1000=1,75616, 5000=1,69344 (USD)", RoHS=No, Stock 1=193, Supplier 1=Digi-Key
L1: library part CBC3225T101MR, "Inductor Power Chip Wirewound 100uH 20% 100KHz Ferrite 0.34A 1.82Ohm DCR 1210 T/R", Case Code (Metric)=3225, Case Code (Imperial)=1210, Current Rating=340mA, DC Resistance (DCR)=1.82R, Manufacturer="Taiyo Yuden", Max Operating Temperature=105°C, Min Operating Temperature=-40°C, Package Quantity=1000, Resistance=1.4R, Resistor Type=Wirewound, Saturation Current=270mA, Self Resonant Frequency=6MHz, Supplier Part Number 1=587-1628-1-ND, Test Frequency=100kHz, Tolerance=20%, Inductor Type=POWER, Case/Package=1210, Category="Fixed Inductors", ComponentLink1Description=https://datasheet.ciiva.com/15981/520cbc3225t101mr-15981701.pdf?src-supplier=Onlinecomponents.com, ComponentLink1URL=https://datasheet.ciiva.com/15981/520cbc3225t101mr-15981701.pdf?src-supplier=Onlinecomponents.com, ComponentLink2Description=https://datasheet.ciiva.com/8001/cbc3225t101mr-ss-8001894.pdf?src-supplier=Element14, ComponentLink2URL=https://datasheet.ciiva.com/8001/cbc3225t101mr-ss-8001894.pdf?src-supplier=Element14, ComponentLink3Description=https://datasheet.ciiva.com/26871/getdatasheetpartid-638535-26871174.pdf?src-supplier=Verical, ComponentLink3URL=https://datasheet.ciiva.com/26871/getdatasheetpartid-638535-26871174.pdf?src-supplier=Verical, Core Material=Ferrite, DC Current=340mA, Depth=2.7mm, Halogen Free="Halogen Free", Height=2.5mm, Height - Seated (Max)=0.106inch, Lead Free="Lead Free", Length=0.126inch, Manufacturer Part Number=CBC3225T101MR, Max DC Current=340mA, Military Standard=Not, Mount="Surface Mount", Number of Pins=2, Packaging="Tape and Reel", Pricing 1="1=0,30000, 10=0,26800, 25=0,23480, 50=0,20120, 100=0,18450, 250=0,16776, 500=0,15768 (USD)", Radiation Hardening=No, REACH SVHC=Unknown, RoHS=Yes, RoHS Compliant=Yes, Series=CB, Shielding=Unshielded, Stock 1=46294, Supplier 1=Digi-Key, Termination=SMD/SMT, Width=0.098inch, Inductance=100uH, Inductance Tolerance=20%
R1 R2 R3: library part RC0603FR-0710KL, "10 kOhms ±1% 0.1W, 1/10W Chip Resistor 0603 (1608 Metric) Moisture Resistant Thick Film", Case Code (Metric)=1608, Case Code (Imperial)=0603, Manufacturer=Yageo, Max Operating Temperature=155°C, Max Power Dissipation=100mW, Min Operating Temperature=-55°C, Resistance=10kR, Resistance Tolerance=1%, Resistor Type="Thick Film", Supplier Part Number 1=311-10.0KHRCT-ND, Temperature Coefficient=100ppm/°C, Voltage Rating=75V, Voltage Rating (DC)=50V, Case/Package=0603, Category="Chip SMD Resistors", ComponentLink1Description=https://datasheet.ciiva.com/7660/38590-7660789.pdf?src-supplier=Element14, ComponentLink1URL=https://datasheet.ciiva.com/7660/38590-7660789.pdf?src-supplier=Element14, ComponentLink2Description=https://datasheet.ciiva.com/7983/443971-7983596.pdf?src-supplier=Element14, ComponentLink2URL=https://datasheet.ciiva.com/7983/443971-7983596.pdf?src-supplier=Element14, ComponentLink3Description=https://datasheet.ciiva.com/22747/443971-22747519.pdf?src-supplier=Element14, ComponentLink3URL=https://datasheet.ciiva.com/22747/443971-22747519.pdf?src-supplier=Element14, ComponentLink4Description=https://datasheet.ciiva.com/46440/1868787-46440891.pdf?src-supplier=Element14, ComponentLink4URL=https://datasheet.ciiva.com/46440/1868787-46440891.pdf?src-supplier=Element14, ComponentLink5Description=https://datasheet.ciiva.com/7746/1738695-7746239.pdf?src-supplier=Element14, ComponentLink5URL=https://datasheet.ciiva.com/7746/1738695-7746239.pdf?src-supplier=Element14, ComponentLink6Description=https://datasheet.ciiva.com/15189/getdatasheetpartid-409289-15189591.pdf?src-supplier=Verical, ComponentLink6URL=https://datasheet.ciiva.com/15189/getdatasheetpartid-409289-15189591.pdf?src-supplier=Verical, Construction=Rectangular, Depth=0.8mm, Features="Moisture Resistant", Height=0.45mm, Lead Free="Lead Free", Lead Pitch=0.3mm, Length=1.6mm, Manufacturer Part Number=RC0603FR-0710KL, Military Standard=Not, Number of Pins=2, Number of Terminations=2, Packaging="Tape and Reel", Power Rating=100mW, Pricing 1="1=0,10000, 10=0,02400, 100=0,00970, 1000=0,00436, 2500=0,00378 (USD)", REACH SVHC=Unknown, RoHS=Yes, RoHS Compliant=Yes, Series=RC, Size Code=0603, Stock 1=28996893, Supplier 1=Digi-Key, Termination=SMD/SMT, Tolerance=1%, Weight=7.1E-05oz, Width=0.8mm
R4 R5 R6 R7 R8 R9: library part RC0603JR-071K2L, "1.2 kOhms ±5% 0.1W, 1/10W Chip Resistor 0603 (1608 Metric) Moisture Resistant Thick Film", Case Code (Metric)=1005, Case Code (Imperial)=0402, Manufacturer=Yageo, Manufacturer Part Number=RC0402JR-071K2L, Max Operating Temperature=155°C, Max Power Dissipation=63mW, Min Operating Temperature=-55°C, Package Quantity=1, Power Rating=62.5mW, Resistance=1.2kR, Resistance Tolerance=5%, Resistor Type="Thick Film", Supplier Part Number 1=311-1.2KGRCT-ND, Temperature Coefficient=100ppm/°C, Voltage Rating=50V, Case/Package=0402, Category="Chip SMD Resistors", ComponentLink1Description=https://datasheet.ciiva.com/7983/1018594-7983557.pdf?src-supplier=Element14, ComponentLink1URL=https://datasheet.ciiva.com/7983/1018594-7983557.pdf?src-supplier=Element14, ComponentLink2Description=https://datasheet.ciiva.com/12558/pyu-rc0402-51-rohs-l-6-r-8721-12558349.pdf?src-supplier=Mouser, ComponentLink2URL=https://datasheet.ciiva.com/12558/pyu-rc0402-51-rohs-l-6-r-8721-12558349.pdf?src-supplier=Mouser, ComponentLink3Description=https://datasheet.ciiva.com/7850/1018594-7850165.pdf?src-supplier=Element14, ComponentLink3URL=https://datasheet.ciiva.com/7850/1018594-7850165.pdf?src-supplier=Element14, ComponentLink4Description=https://datasheet.ciiva.com/15189/getdatasheetpartid-325064-15189548.pdf?src-supplier=Verical, ComponentLink4URL=https://datasheet.ciiva.com/15189/getdatasheetpartid-325064-15189548.pdf?src-supplier=Verical, ComponentLink5Description=https://datasheet.ciiva.com/17068/pyu-rc0402-51-rohs-l-6-r-17068326.pdf?src-supplier=Future+Electronics, ComponentLink5URL=https://datasheet.ciiva.com/17068/pyu-rc0402-51-rohs-l-6-r-17068326.pdf?src-supplier=Future+Electronics, ComponentLink6Description=https://datasheet.ciiva.com/2452/pyu-r-int-thick-7-2452873.pdf?src-supplier=Digi-Key, ComponentLink6URL=https://datasheet.ciiva.com/2452/pyu-r-int-thick-7-2452873.pdf?src-supplier=Digi-Key, ComponentLink7Description=https://datasheet.ciiva.com/2452/pyu-r-int-thick-7-2452874.pdf?src-supplier=Digi-Key, ComponentLink7URL=https://datasheet.ciiva.com/2452/pyu-r-int-thick-7-2452874.pdf?src-supplier=Digi-Key, ComponentLink8Description=https://datasheet.ciiva.com/2452/pyu-r-int-thick-7-2452872.pdf?src-supplier=Digi-Key, ComponentLink8URL=https://datasheet.ciiva.com/2452/pyu-r-int-thick-7-2452872.pdf?src-supplier=Digi-Key, ComponentLink9Description=https://datasheet.ciiva.com/7746/443971-7746456.pdf?src-supplier=Element14, ComponentLink9URL=https://datasheet.ciiva.com/7746/443971-7746456.pdf?src-supplier=Element14, ComponentLink10Description=https://datasheet.ciiva.com/7746/443971-7746455.pdf?src-supplier=Element14, ComponentLink10URL=https://datasheet.ciiva.com/7746/443971-7746455.pdf?src-supplier=Element14, Construction=Rectangular, Depth=0.5mm, Features="Moisture Resistant", Height=0.35mm, Lead Free="Lead Free", Length=1mm, Military Standard=Not, Number of Pins=2, Number of Terminations=2, Packaging="Tape and Reel", Pricing 1="1=0,10000, 10=0,01300, 100=0,00540, 1000=0,00244, 2500=0,00212, 5000=0,00175 (USD)", Pricing 2="1=0,10000, 10=0,02000, 100=0,00800, 1000=0,00360, 2500=0,00312 (USD)", REACH SVHC="No SVHC", RoHS=Yes, RoHS Compliant=Yes, Series=RC, Size Code=0402, Stock 1=52843, Stock 2=141800, Supplier 1=Digi-Key, Termination=SMD/SMT, Tolerance=5%, Voltage Rating (DC)=50V, Width=0.5mm
RV1: "ESD Suppressor Diode TVS Bi-Dir 30V 2-Pin Case 0402 T/R", Manufacturer=Panasonic, Supplier Part Number 1=P122038CT-ND, Category=Varistors, ComponentLink1Description=https://industrial.panasonic.com/cdbs/www-data/pdf/AWD0000/AWD0000C13.pdf?src-supplier=Digi-Key, ComponentLink1URL=https://industrial.panasonic.com/cdbs/www-data/pdf/AWD0000/AWD0000C13.pdf?src-supplier=Digi-Key, Manufacturer Part Number=EZA-EG2N50AX, Pricing 1="1=0,59000, 10=0,42800, 25=0,33240, 100=0,25180, 250=0,17816, 500=0,14252, 1000=0,10927, 2500=0,09502, 5000=0,08551 (USD)", RoHS=No, Stock 1=57944, Supplier 1=Digi-Key
U1: "IC REG BUCK 5V 3A TO263-5", Case/Package=TO-263-6, Manufacturer="TI National Semiconductor", Max Operating Temperature=125°C, Max Output Current=3A, Max Input Voltage=40V, Min Operating Temperature=-40°C, Min Input Voltage=4V, Nominal Output Voltage=5V, Package Quantity=500, Quiescent Current=5mA, Supplier Part Number 1=LM2576SX-5.0/NOPBCT-ND, Switching Frequency=52kHz, Category="Voltage Regulators - Switching", ComponentLink1Description=https://datasheet.ciiva.com/41457/001013741-da-01-en-ic-reg-bu-lm2576sx-5-0-nopb-to-263-5-tid-41457614.pdf?src-supplier=Conrad, ComponentLink1URL=https://datasheet.ciiva.com/41457/001013741-da-01-en-ic-reg-bu-lm2576sx-5-0-nopb-to-263-5-tid-41457614.pdf?src-supplier=Conrad, Contact Plating=Tin, Efficiency=77%, Lead Free="Contains Lead", Manufacturer Part Number=LM2576SX-5.0/NOPB, Mount="Surface Mount", Number of Outputs=1, Number of Pins=5, Operating Supply Voltage=40V, Output Current=3A, Output Type=Fixed, Output Voltage=5V, Packaging="Tape and Reel", Pricing 1="1=4,06000, 10=3,64300, 25=3,44400, 100=2,98470, 250=2,83168 (USD)", Radiation Hardening=No, REACH SVHC="No SVHC", RoHS=Yes, RoHS Compliant=Yes, Series="SIMPLE SWITCHER®", Stock 1=4832, Supplier 1=Digi-Key, Synchronous Rectifier=No
U2: "8-bit 2.5- to 5.5-V I2C/SMBus I/O expander with interrupt 20-TVSOP -40 to 85", Case/Package=TFSOP, Frequency=100kHz, Manufacturer="Texas Instruments", Max Operating Temperature=85°C, Max Supply Voltage=6V, Min Operating Temperature=-40°C, Min Supply Voltage=2.5V, Package Quantity=1, Supplier Part Number 1=595-PCF8574DGVR, Category="Interface ICs", ComponentLink1Description=https://datasheet.ciiva.com/1780/pcf8574-1780221.pdf?src-supplier=Digi-Key, ComponentLink1URL=https://datasheet.ciiva.com/1780/pcf8574-1780221.pdf?src-supplier=Digi-Key, ComponentLink2Description=https://datasheet.ciiva.com/1780/pcf8574-1780220.pdf?src-supplier=Digi-Key, ComponentLink2URL=https://datasheet.ciiva.com/1780/pcf8574-1780220.pdf?src-supplier=Digi-Key, ComponentLink3Description=https://datasheet.ciiva.com/1780/pcf8574-1780222.pdf?src-supplier=Digi-Key, ComponentLink3URL=https://datasheet.ciiva.com/1780/pcf8574-1780222.pdf?src-supplier=Digi-Key, ComponentLink4Description=https://datasheet.ciiva.com/26238/pcf8574-26238107.pdf?src-supplier=Avnet+Europe, ComponentLink4URL=https://datasheet.ciiva.com/26238/pcf8574-26238107.pdf?src-supplier=Avnet+Europe, Lead Free="Lead Free", Manufacturer Part Number=PCF8574DGVR, Max Frequency=100kHz, Mount="Surface Mount", Number of Outputs=8, Number of Pins=20, Number of I/Os=8, Packaging="Tape and Reel", Pricing 1="1=1,95000, 10=1,76000, 50=1,66000, 100=1,41000, 1000=0,95900, 10000=0,95900 (USD)", RoHS=Yes, RoHS Compliant=Yes, Stock 1=2777, Supplier 1=Mouser, Weight=0.002123oz, Interface=I2C
U3: "100-V, 7-ch darlington array with CMOS or PMOS compatibility 16-SOIC 0 to 70", Case/Package=SOIC, Collector Emitter Breakdown Voltage=100V, Collector Emitter Saturation Voltage=1.1V, Collector-emitter Voltage-Max=1.6V, Manufacturer="Texas Instruments", Max Collector Current=500mA, Max Operating Temperature=70°C, Min Operating Temperature=0°C, Package Quantity=2500, Supplier Part Number 1=296-36726-1-ND, Category=BJTs, Collector Emitter Voltage (VCEO)=100V, ComponentLink1Description=https://datasheet.ciiva.com/29571/sn75468-29571866.pdf?src-supplier=Digi-Key, ComponentLink1URL=https://datasheet.ciiva.com/29571/sn75468-29571866.pdf?src-supplier=Digi-Key, ComponentLink2Description=https://datasheet.ciiva.com/29571/sn75468-29571865.pdf?src-supplier=Digi-Key, ComponentLink2URL=https://datasheet.ciiva.com/29571/sn75468-29571865.pdf?src-supplier=Digi-Key, ComponentLink3Description=https://datasheet.ciiva.com/29571/sn75468-29571867.pdf?src-supplier=Digi-Key, ComponentLink3URL=https://datasheet.ciiva.com/29571/sn75468-29571867.pdf?src-supplier=Digi-Key, ComponentLink4Description=https://datasheet.ciiva.com/14424/sn75468-14424055.pdf?src-supplier=Avnet, ComponentLink4URL=https://datasheet.ciiva.com/14424/sn75468-14424055.pdf?src-supplier=Avnet, Lead Free="Lead Free", Manufacturer Part Number=SN75469DR, Max Breakdown Voltage=100V, Mount="Surface Mount", Number of Drivers=7, Number of Elements=7, Number of Pins=16, Packaging="Tape and Reel", Polarity=NPN, Pricing 1="1=0,91000, 10=0,81000, 100=0,63140, 500=0,52162, 1000=0,45325 (USD)", Radiation Hardening=No, RoHS=Yes, RoHS Compliant=Yes, Series=-, Stock 1=1975, Supplier 1=Digi-Key, Weight=0.004998oz

## Free pads (board coordinates)
  round 0 hole 2 unplated mask+0.102: 3(1.305,1.306) 3(75.305,1.306)
  round 0 hole 2 unplated: 3(1.305,70.306) 3(75.305,70.306)

## Via types
v1: diameter 1.27, hole 0.711, Top Layer to Bottom Layer, tented both sides, 15 vias
v2: diameter 0.635, hole 0.381, Top Layer to Bottom Layer, tented both sides, 12 vias

## Nets (pads, with @x,y where several pads share a name; then routed paths per layer and width w, separated by ;. In a path a pad name is that pad's centre, name@x,y a point inside that pad or via, vN(x,y) a via of type N, cw(c..) or ccw(c..) an arc to the next point about the centre after c; other vN are vias at no path point)
+5VDC: C4.1 L1.2 R1.2 R2.2 R3.2 U1.4 U2.5 | length 12.8
  Top Layer w0.254: v1(59.055,54.756) 59.166,54.756 59.766,55.356 U2.5
  Top Layer w0.305: v1(60.455,60.356) R1.2 ; R2.2 v1(64.855,59.256) 64.88,59.231 66.352,59.231 66.355,59.228 R3.2
  Top Layer w0.508: U1.4 31.84,56.439 31.84,53.371 v1@31.855,53.356 ; L1.2 33.7,47.786 36.485,47.786 v1(36.555,47.856)
  other v1: 31.875,53.406
  other v2: 45.955,41.856 48.255,41.856 44.855,45.056 49.455,45.056 44.855,46.056 49.455,46.056 44.855,47.056 49.455,47.056 44.855,48.056 49.455,48.056 45.955,50.256 48.255,50.256
GND: C1.1 C2.1 C3.1 C4.2 CN2.2 D1.A D2.1 D14.1 RV1.1 U1.3 U1.5 U1.6 U2.3 U2.6 U2.7 U2.8 U2.9 U2.13 U2.15 U2.18 U3.8
I2C_SCL: CN1.2 R2.1 U2.2 | length 15.9
  Top Layer w0.178: U2.2 61.383,56.522 60.569,56.522 60.406,56.359 58.152,56.359 57.455,57.056 57.455,57.45 57.955,57.95 61.775,57.95 63.608,59.783 63.608,60.193 63.771,60.356 ; R2.1 63.771,60.356 ; CN1.2 64.374,62.358 63.913,61.897 63.74,61.897 63.577,61.734 63.577,61.364 63.608,61.333 63.608,60.519 63.771,60.356
I2C_SDA: CN1.1 R1.1 U2.4 | length 16.6
  Top Layer w0.178: U2.4 61.383,55.79 60.569,55.79 60.406,55.953 57.984,55.953 57.049,56.888 57.049,57.618 57.787,58.356 61.607,58.356 63.202,59.951 63.202,60.193 63.039,60.356 ; CN1.1 62.374,62.358 62.835,61.897 63.008,61.897 63.171,61.734 63.171,61.196 63.202,61.165 63.202,60.519 63.039,60.356 ; R1.1 63.039,60.356
IN1: U2.10 U3.1 | length 21.2
  Top Layer w0.254: U2.10 60.255,53.356 57.855,50.956 57.855,47.205 58.004,47.056 67.31,47.056 69.2,48.946 U3.1
IN2: U2.11 U3.2 | length 5.3
  Top Layer w0.203: U2.11 68.455,53.356 68.655,53.156 68.655,51.038 68.106,50.489 68.103,50.489 67.93,50.316 U3.2
IN3: U2.12 U3.3 | length 5.7
  Top Layer w0.203: U3.3 66.66,51.098 65.955,51.803 65.955,53.58 66.104,53.729 66.682,53.729 66.709,53.756 U2.12
IN4: U2.14 U3.4 | length 6.5
  Top Layer w0.203: U3.4 65.355,49.666 65.355,53.956 65.955,54.556 U2.14
IN5: U2.16 U3.5 | length 8.1
  Top Layer w0.203: U3.5 64.155,49.666 64.155,54.056 65.455,55.356 U2.16
INT: CN1.3 R3.1 U2.1 | length 11.8
  Top Layer w0.254: U2.1 63.005,56.956 64.305,58.256 67.156,58.256 67.305,58.405 67.305,59.807 67.156,59.956 66.378,59.956 66.355,59.933 R3.1 ; R3.1@66.355,59.956 66.355,62.839 CN1.3
NetCN3_1: CN3.1 K1.NO | length 11.3
  Bottom Layer w1.143: K1.NO 11.635,6.884 12.426,6.884 CN3.1
NetCN3_2: CN3.2 K1.COM | length 19.9
  Bottom Layer w1.016: K1.COM 4.564,19.747 16.135,8.176 16.135,6.676 CN3.2
NetCN3_3: CN3.3 K1.NC | length 13.1
  Bottom Layer w1.016: K1.NC 19.755,8.925 CN3.3
NetCN3_4: CN3.4 K2.NO | length 8.9
  Bottom Layer w1.016: K2.NO 22.168,11.343 22.168,8.638 23.105,7.701 23.105,6.706 CN3.4
NetCN3_5: CN3.5 K2.COM | length 18
  Bottom Layer w1.143: K2.COM 19.555,18.119 24.698,12.975 24.698,9.61 26.629,7.679 26.629,6.682 CN3.5
NetCN4_1: CN4.1 K2.NC | length 11.6
  Bottom Layer w1.016: K2.NC 27.175,10.636 CN4.1
NetCN4_2: CN4.2 K3.NO | length 7.5
  Bottom Layer w1.016: K3.NO 34.655,13.856 34.655,6.656 CN4.2
NetCN4_3: CN4.3 K3.COM | length 16.6
  Bottom Layer w1.016: K3.COM 34.555,19.291 38.255,15.591 CN4.3
NetCN4_4: CN4.4 K3.NC | length 10.1
  Bottom Layer w1.016: CN4.4 41.755,6.768 42.175,7.188 K3.NC
NetCN4_5: CN4.5 K4.NO | length 9.2
  Bottom Layer w1.016: CN4.5 45.255,9.656 K4.NO
NetCN5_1: CN5.1 K4.COM | length 17.3
  Bottom Layer w1.016: K4.COM 49.555,18.256 52.435,15.376 52.435,12.306 50.147,10.018 50.147,6.948 CN5.1
NetCN5_2: CN5.2 K4.NC | length 11.6
  Bottom Layer w1.016: CN5.2 53.255,9.546 57.175,13.466 K4.NC
NetCN5_3: CN5.3 K5.NO | length 12.2
  Bottom Layer w1.016: CN5.3 56.755,9.256 61.455,13.956 K5.NO
NetCN5_4: CN5.4 K5.COM | length 21.4
  Bottom Layer w1.016: CN5.4 60.255,8.119 62.941,10.806 65.905,10.806 67.855,12.756 67.855,15.271 64.319,18.807 K5.COM
NetCN5_5: CN5.5 K5.NC | length 14.7
  Bottom Layer w1.016: CN5.5 66.055,6.556 71.939,12.44 K5.NC
NetD1_C: D1.C L1.1 U1.2 | length 16.7
  Top Layer w0.381: U1.2 28.425,45.649 D1.C 28.778,44.956 33.57,44.956 L1.1
NetD2_2: D2.2 R4.1 | length 12.9
  Top Layer w0.254: D2.2 1.155,53.006 1.155,63.406 2.805,65.056 R4.1
NetD8_2: D8.2 R5.2 | length 10.8
  Top Layer w0.305: D8.2 63.847,36.456 64.955,36.456 65.755,37.256 72.155,37.256 73.006,36.405 R5.2
NetD9_2: D9.2 R6.2 | length 10.8
  Top Layer w0.305: D9.2 49.887,36.406 50.737,37.256 57.137,37.256 57.957,36.435 57.957,35.508 R6.2
NetD10_2: D10.2 R7.2 | length 10.9
  Top Layer w0.305: D10.2 34.183,36.456 35.291,36.456 36.091,37.256 42.491,37.256 43.255,36.492 R7.2
NetD11_2: D11.2 R8.2 | length 10.8
  Top Layer w0.305: D11.2 20.26,36.406 21.11,37.256 27.51,37.256 28.255,36.511 R8.2
NetD12_2: D12.2 R9.2 | length 10.8
  Top Layer w0.305: D12.2 5.263,36.406 6.113,37.256 12.513,37.256 13.355,36.414 R9.2
NetD13_1: D13.1 D14.2
NetD13_2: D13.2 F1.2 RV1.2 | length 0.2
  Top Layer w0.305: F1.2 F1.2@13.255,62.056
OUT1: D7.2 D12.1 K1.C2 U3.16 | length 92.8
  Top Layer w0.381: U3.16 69.209,44.672 69.209,43.402 v1(70.355,42.256)
  Bottom Layer w0.381: K1.C2 11.244,25.056 71.805,25.056 74.305,27.556 74.305,38.306 v1(70.355,42.256)
OUT2: D6.2 D11.1 K2.C2 U3.15 | length 71.7
  Top Layer w0.381: U3.15 67.93,43.081 v1(68.755,42.256)
  Bottom Layer w0.381: K2.C2 19.555,30.306 23.555,26.306 68.055,26.306 70.055,28.306 70.055,40.956 v1(68.755,42.256)
OUT3: D5.2 D10.1 K3.C2 U3.14 | length 52
  Top Layer w0.381: U3.14 66.66,42.891 67.055,42.496 v1(67.055,42.256)
  Bottom Layer w0.381: K3.C2 38.735,27.556 66.055,27.556 68.305,29.806 68.305,41.006 v1(67.055,42.256)
OUT4: 
OUT4: C1.2 C2.2 C3.2 CN2.1 D3.1 D4.1 D4.2 D5.1 D6.1 D7.1 D9.1 F1.1 K1.C1 K2.C1 K3.C1 K4.C1 K4.C2 K5.C1 R4.2 R5.1 R6.1 R7.1 R8.1 R9.1 U1.1 U3.9 U3.13 | length 35.8
  Top Layer w0.381: U3.13 65.422,44.648 65.422,42.288 v1(65.455,42.256)
  Top Layer w0.508: U3.9 60.332,44.658 60.332,42.478 v1@60.355,42.456
  Bottom Layer w0.381: K4.C2 52.485,28.806 64.805,28.806 66.555,30.556 66.555,41.156 v1(65.455,42.256)
  other v1: 60.355,42.256 17.99,53.891 21.89,53.891 25.79,53.891 24.69,55.991
OUT5: D3.2 D8.1 K5.C2 U3.12 | length 17.7
  Top Layer w0.381: D8.1@63.469,34.156 63.718,34.405 66.409,34.405 D3.2 ; v1(63.555,42.256) 63.555,42.496 64.12,43.061 U3.12
  Bottom Layer w0.381: v1(63.555,42.256) 63.555,42.056 64.555,41.056 64.555,31.972 K5.C2
pads on no net: CN1.4 CN1.5 U2.17 U2.19 U2.20 U3.6 U3.7 U3.10 U3.11

## Polygon pours and split planes (outlines as drawn)
GND on Top Layer "NONET_L01_P-001" (solid, remove dead copper, pour order 22): 0,71.356 76.603,71.356 76.603,43.656 0,43.656